# Altium PCB S6XT10W.PcbDoc (part 1 of 2)
Units mm, origin at the board's own origin, x right, y up, seen from the top; angles counter-clockwise.
Board outline 35 x 65.67 mm, 5 copper layers (Top Layer, Mid-Layer 2, Mid-Layer 6, Mid-Layer 13, Bottom Layer); 90 components, 58 nets, 296 pads, 188 vias.
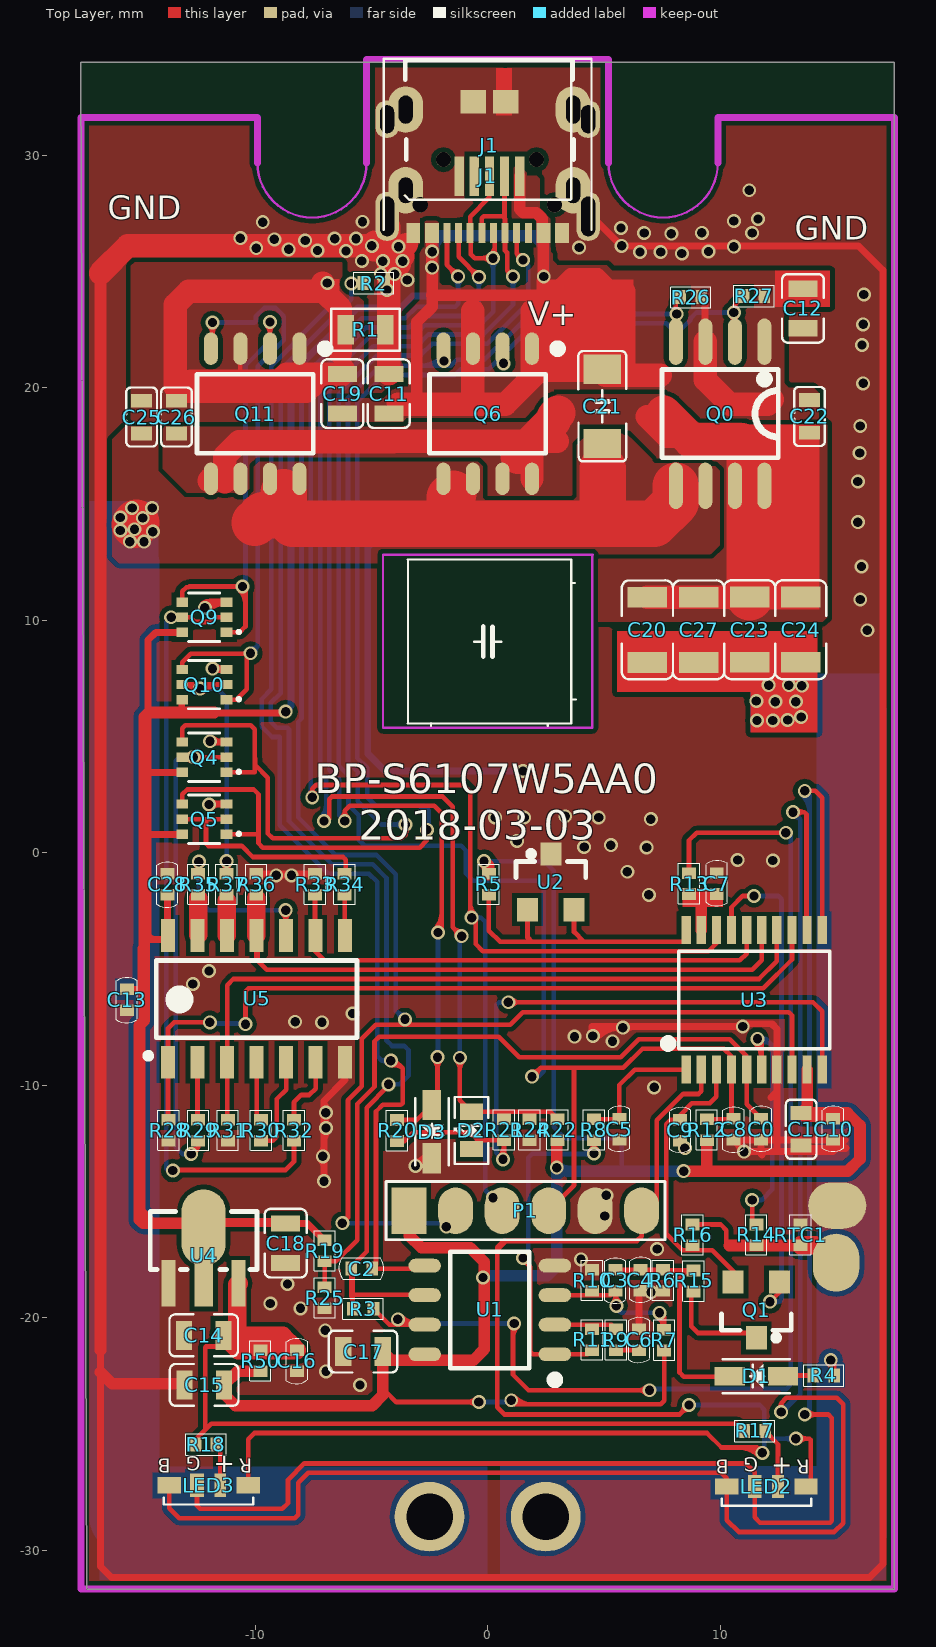
[diagram p0: Top Layer view]
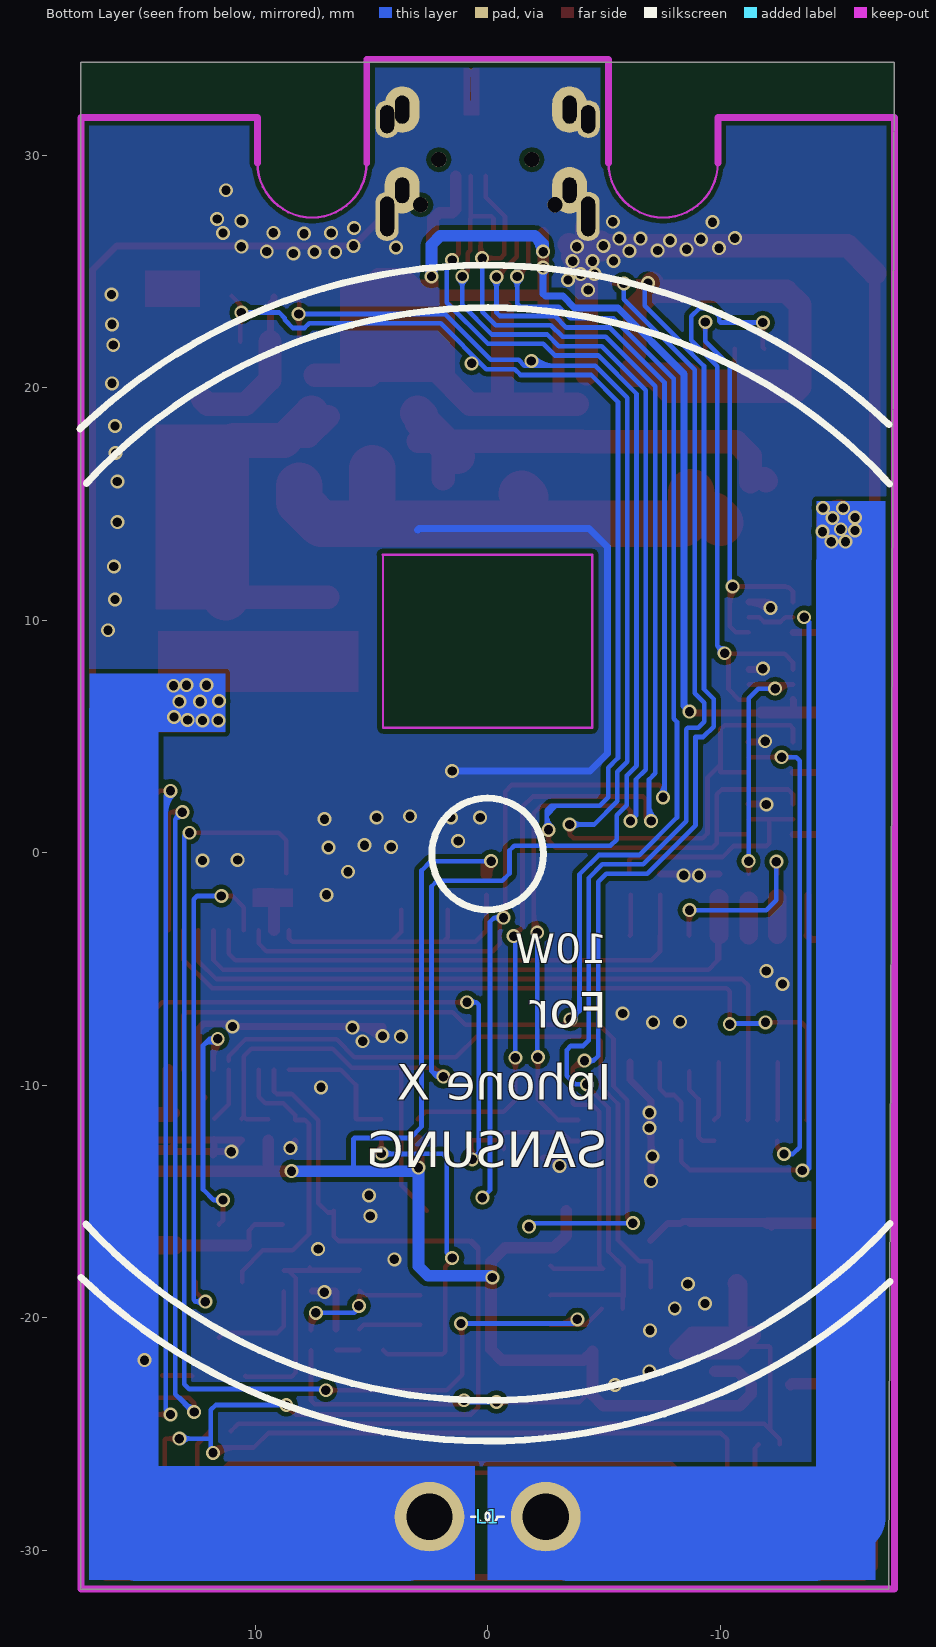
[diagram p1: Bottom Layer view, seen from below]
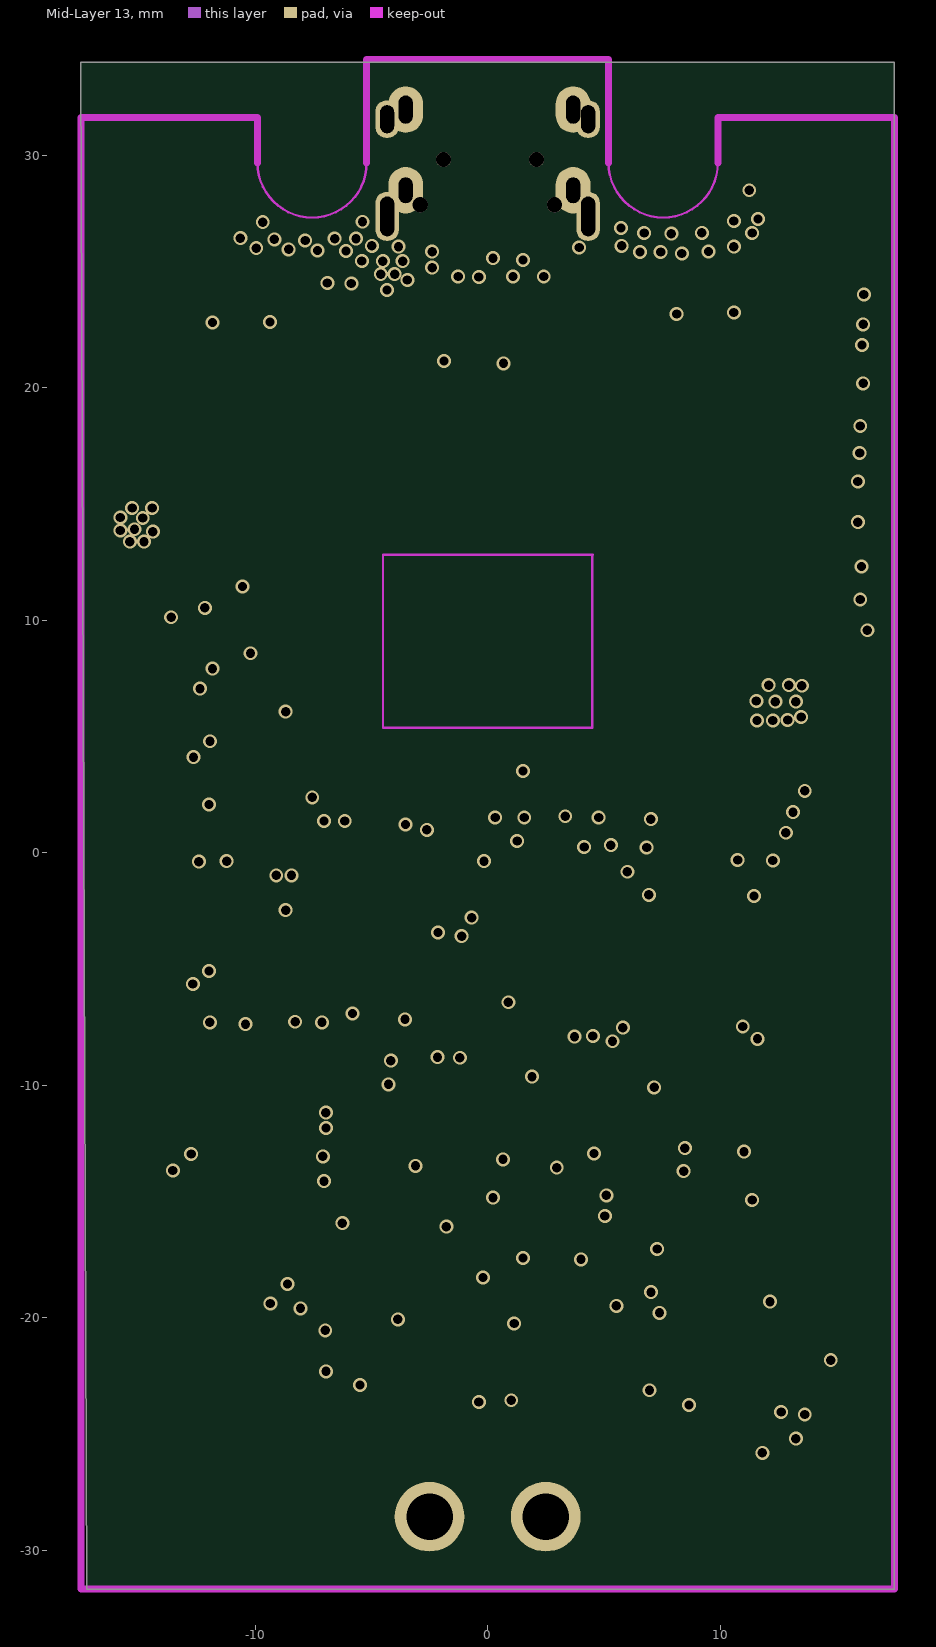
[diagram p2: Mid-Layer 13]

## Layer stack, top to bottom
Top Layer: signal copper 0.0356
Dielectric: dielectric 0.32, FR-4, Dk 4.8
Mid-Layer 2: signal copper 0.0356
Dielectric: dielectric 0.32, FR-4, Dk 4.8
Mid-Layer 6: signal copper 0.0356
Dielectric: dielectric 0.32, FR-4, Dk 4.8
Mid-Layer 13: signal copper 0.0356
Dielectric: dielectric 0.32, FR-4, Dk 4.8
Bottom Layer: signal copper 0.0356

## Board outline
-17.25,-31.674 17.499,-31.674 17.5,-31.673 17.5,34 -17.5,34

## Design rules (kind name [scope] priority, off if disabled: settings)
Clearance [All] p1: gap=0.2
ComponentClearance [All] p1 off: gap=0.254 collisioncheckmode=3 verticalgap=0.254 showdistances=FALSE
FabricationTestPointUsage TestPointUsage [All] p1: valid=0 allowmultiple=FALSE
FabricationTestpoint Testpoint [All] p1: side=3 testpointundercomponent=TRUE minsize=1.016 maxsize=2.54 preferedsize=1.524 minholesize=0 maxholesize=1.016 preferedholesize=0.813 testpointgrid=0.025 allowsidetop=TRUE allowsidebottom=TRUE usegrid=TRUE gridtolerance=0
HoleToHoleClearance [All] p1 off: gap=0.254 allowstackedmicrovias=TRUE
MinimumSolderMaskSliver [All] p1 off: minsoldermaskwidth=0.254
PlaneConnect [All] p1: planeconnectstyle=Direct reliefexpansion=0.508 reliefentries=4 reliefconductorwidth=0.254 reliefairgap=0.254
PolygonConnect [All] p1: connectstyle=Direct reliefconductorwidth=0.254 reliefentries=4 polygonreliefangle="90 Angle"
RoutingVias [All] p1: holewidth=0.4 width=0.6 viastyle="Through Hole" minholewidth=0.4 minwidth=0.6 maxholewidth=0.4 maxwidth=0.6
SilkToSilkClearance [All] p1 off: silktosilkclearance=0.254
SilkscreenOverComponentPads [All] p1 off: minsilkscreentomaskgap=0.254
SolderMaskExpansion [All] p1: expansion=0.102
Width [All] p1: maxlimit=5 minlimit=0.1 preferedwidth=0.2
20 further rules are at their usual default settings.

## Classes and differential pairs
component class XL-PT900XT10W_MAIN: C0 C3 C4 C5 C7 C8 C9 C10 C17 D1 LED2 LED3 P1 Q1 R4 R5 R6 R7 R8 R9 R10 R11 R12 R13 R14 R15 R16 R17 R18 RTC1 U1 U2 U3
component class "XL-PT900XT10W POWER_V17": C1 C2 C11 C12 C13 C14 C15 C16 C18 C19 C20 C21 C22 C23 C24 C25 C26 C27 C28 D2 D3 J1 L1 Q0 Q4 Q5 Q6 Q9 Q10 Q11 R1 R2 R3 R19 R20 R21 R22 R24 R25 R26 R27 R28 R29 R30 R31 R32 R33 R34 R35 R36 R37 R50 U4 U5

## Components (designator, comment, footprint, x,y, rotation, side; value= is the part's Value field where it differs from the comment)
C0 "103" C0402 11.76,-11.887 r90 top
C1 "106" C0603 13.487,-11.887 r90 top
C2 "103" C0402 -5.41,-17.882 r180 top
C3 "103" C0402 5.493,-18.387 r270 top
C4 "333" C0402 6.568,-18.387 r90 top
C5 "103" C0402 5.664,-11.887 r90 top
C6 "104" C0402 6.518,-20.937 r270 top
C7 "103" C0402 9.855,-1.321 r90 top
C8 "104" C0402 10.578,-11.895 r270 top
C9 "102" C0402 8.28,-11.938 r90 top
C10 "104" C0402 14.859,-11.887 r90 top
C11 "106/16V" C0805 -4.25,19.75 r90 top
C12 "106/16V" C0805 13.564,23.419 r270 top
C13 "104" C0402 -15.519,-6.325 r270 top
C14 "226" C0805 -12.211,-20.752 r180 top
C15 "226" C0805 -12.192,-22.885 r0 top
C16 "100P" C0402 -8.204,-21.844 r270 top
C17 "226" C0805 -5.359,-21.45 r0 top
C18 "106/16V" C0805 -8.687,-16.789 r270 top
C19 "106/16V" C0805 -6.25,19.75 r90 top
C20 "104/50V" C1206#1 6.87,9.593 r90 top
C21 "223" C1206#2 4.928,19.202 r90 top
C22 "223" C0603 13.843,18.771 r90 top
C23 "104/50V" C1206#1 11.27,9.598 r90 top
C24 "473/50V" C1206#1 13.47,9.599 r90 top
C25 "223" C0603 -14.884,18.745 r270 top
C26 "223" C0603 -13.386,18.745 r270 top
C27 "104/50V" C1206#1 9.071,9.593 r90 top
C28 "104" C0402 -13.777,-1.356 r270 top
D1 "4148" sod323 11.557,-22.504 r180 top
D2 "Red" LED0603 -0.695,-11.941 r90 top
D3 "4148" SOD323 -2.4,-11.992 r270 top
J1 "USB5P" "USB -MRO05" 0.076,30.81 r0 top
J1 "Typer-c" "USB -MRO17" 0,29.108 r0 top locked
L1 "" l5mm 0,-28.551 r0 bottom
LED2 "RGB" LED-RGB02 11.989,-27.254 r180 top
LED3 "RGB" LED-RGB02 -12,-27.203 r180 top
P1 "" SPIN6 1.626,-15.392 r0 top
Q0 "4953" SOP8D#1 10,18.888 r180 top
Q1 "2N7002" SOT-23B 11.557,-19.66 r180 top
Q4 "2227" SOT363 -12.183,4.115 r90 top
Q5 "2227" SOT363 -12.183,1.448 r90 top
Q6 "4953" SOP8D#2 0,18.888 r180 top
Q9 "2227" SOT363 -12.183,10.135 r90 top
Q10 "2227" SOT363 -12.183,7.239 r90 top
Q11 "9926" SOP8D#2 -10,18.888 r180 top
R1 "0.033R" R0805 -5.25,22.5 r180 top
R2 "1K" R0402 -4.902,24.511 r0 top
R3 "33K" R0402 -5.359,-19.609 r0 top
R4 "1K" R0402 14.453,-22.479 r0 top
R5 "2.2K" R0402 0.051,-1.346 r270 top
R6 "33K" R0402 7.543,-18.387 r90 top
R7 "100K" R0402 7.595,-20.955 r90 top
R8 "1K" R0402 4.572,-11.913 r270 top
R9 "33K" R0402 5.518,-20.937 r90 top
R10 "68K" R0402 4.493,-18.387 r90 top
R11 "1M" R0402 4.493,-20.937 r90 top
R12 "10K" R0402 9.43,-11.913 r90 top
R13 "1K" R0402 8.661,-1.321 r90 top
R14 "1K" R0402 11.557,-16.434 r90 top
R15 "68K" R0402 8.859,-18.415 r270 top
R16 "10K" R0402 8.814,-16.434 r90 top
R17 "220" R0402 11.489,-24.867 r0 top
R18 "220" R0402 -12.116,-25.445 r0 top
R19 "10K" R0402 -7.01,-17.12 r90 top
R20 "4.7K" R0402 -3.895,-11.942 r90 top
R21 "4.7K" R0402 0.705,-11.911 r270 top
R22 "10K" R0402 3.005,-11.911 r270 top
R24 "2.2K" R0402 1.805,-11.911 r90 top
R25 "10K" R0402 -7.01,-19.13 r90 top
R26 "100K" R0402 8.738,23.901 r180 top
R27 "100K" R0402 11.455,23.952 r0 top
R28 "100K" R0402 -13.727,-11.938 r270 top
R29 "1K" R0402 -12.452,-11.938 r270 top
R30 "1K" R0402 -9.754,-11.938 r270 top
R31 "100K" R0402 -11.177,-11.938 r270 top
R32 "1K" R0402 -8.331,-11.938 r270 top
R33 "100K" R0402 -7.427,-1.356 r90 top
R34 "1K" R0402 -6.152,-1.356 r90 top
R35 "1K" R0402 -12.452,-1.356 r270 top
R36 "100K" R0402 -9.952,-1.356 r90 top
R37 "1K" R0402 -11.227,-1.356 r90 top
R50 "10R" R0402 -9.779,-21.844 r270 top
RTC1 "103J" R0402 13.462,-16.434 r270 top
U1 "LM358" SOP8 0.093,-19.661 r90 top locked
U2 "TL431" SOT-23-431 2.718,-1.245 r0 top
U3 "N76E003" SOP20 11.465,-6.325 r90 top
U4 "7150" SOT89a -12.217,-17.323 r0 top
U5 "4069" SOP14 -9.302,-6.281 r90 top locked
? "" C6070 0.076,9.093 r180 top

## Footprints (in the part's own frame and the unit in brackets; to place one, negate y for a bottom-side part, rotate by r counter-clockwise, add the part's x,y. Pads: shape width x height; smd on the part's side, far side on the other; paste and mask are expansions set on the pad)
C0402 [mm]
  rect 0.5x0.6 smd: 1(-0.45,0) 2(0.45,0)
  silkscreen extent -0.95,-0.46 0.99,0.46
C0603 [mm]
  rect 0.6x0.9 smd: 1(-0.7,0) 2(0.7,0)
  silkscreen extent -1.27,-0.66 1.27,0.66, body extent -0.8,-0.4 0.8,0.4, height 0.4
C0805 [mm]
  rect 0.7x1.25 smd: 1(-0.85,0) 2(0.85,0)
  silkscreen extent -1.47,-0.9 1.47,0.9, body extent -1,-0.62 1,0.63, height 0.8
C1206#1 [mm]
  rect 0.9x1.7 smd: 1(-1.4,0) 2(1.4,0)
  silkscreen extent -2.13,-1.1 2.13,1.1, body extent -1.6,-0.8 1.6,0.8, height 1.02
C1206#2 [mm]
  rect 1.25x1.6 smd: 1(-1.6,0) 2(1.6,0)
  silkscreen extent -2.36,-1.04 2.38,1.02, body extent -1.6,-0.8 1.6,0.8, height 0.55
C6070 [mm]
  silkscreen extent -3.71,-3.52 3.52,3.63
l5mm [mm]
  round 3 hole 2: 1(-2.5,0) 2(2.5,0)
  silkscreen extent -0.69,-0.21 0.7,0.25
LED0603 [mm]
  rect 0.7x1 smd mask+0.05: 1(-0.8,0) 2(0.8,0)
  silkscreen extent -1.44,-0.73 1.44,0.76
LED-RGB02 [mm]
  rect 0.5x1 smd: 1(-0.5,0)
  rect 1x0.7 smd: 2(1.7,0) 4(-1.7,0)
  rect 0.6x1 smd: 3(0.5,0)
  silkscreen extent -1.92,0.53 1.92,0.83
R0402 [mm]
  rect 0.5x0.6 smd: 1(-0.45,0) 2(0.45,0)
  silkscreen extent -0.86,-0.46 0.86,0.46
R0805 [mm]
  rect 0.7x1.25 smd: 1(-0.85,0) 2(0.85,0)
  silkscreen extent -1.48,-0.9 1.48,0.9, body extent -1,-0.63 1,0.63, height 0.55
sod323 [mm] "0805"
  rect 1.3x0.8 smd: 1(-1.15,0) 2(1.14,0)
  silkscreen extent -1.44,-0.72 1.44,0.73, body extent -1.3,-0.65 1.3,0.65, height 1
SOD323 [mm] "0805"
  rect 1.3x0.8 smd: 1(-1.15,0) 2(1.14,0)
  silkscreen extent -1.44,-0.72 1.44,0.73, body extent -1.3,-0.65 1.3,0.65, height 1
SOP8 [mm]
  oval 0.6x1.4 smd: 1(-1.905,-2.8) 2(-0.635,-2.8) 3(0.635,-2.8) 4(1.905,-2.8) 5(1.905,2.8) 6(0.635,2.8) 7(-0.635,2.8) 8(-1.905,2.8)
  silkscreen extent -3.11,-2.91 2.5,1.7, body extent -2.5,-3.03 2.52,3.01, height 1.6
SOP8D#1 [mm]
  oval 0.6x2 smd: B1(-0.635,-3.1) B2(1.905,-3.1) C1(-1.905,3.1) C1(-0.635,3.1) C2(0.635,3.1) C2(1.905,3.1) E1(-1.905,-3.1) E2(0.635,-3.1)
  silkscreen extent -2.5,-1.9 2.5,1.9
SOP8D#2 [mm]
  oval 0.6x1.4 smd: B1(-0.635,-2.8) B2(1.905,-2.8) C1(-1.905,2.8) C1(-0.635,2.8) C2(0.635,2.8) C2(1.905,2.8) E1(-1.905,-2.8) E2(0.635,-2.8)
  silkscreen extent -3.11,-2.91 2.5,1.7, body extent -2.5,-3.02 2.52,3.02, height 1.6
SOP14 [mm]
  rect 1.4x0.6 smd: 1(-2.725,4.445) 2(-2.725,3.175) 3(-2.725,1.905) 4(-2.725,0.635) 5(-2.725,-0.635) 6(-2.725,-1.905) 7(-2.725,-3.175) 8(2.725,-3.175) 9(2.725,-1.905) 10(2.725,-0.635) 11(2.725,0.635) 12(2.725,1.905) 13(2.725,3.175) 14(2.725,4.445)
  silkscreen extent -2.57,-3.68 1.65,5.42, body extent -3.06,-3.7 3.14,5, height 1.61
SOP20 [mm]
  rect 1.2x0.4 smd: 1(-3,2.925) 2(-3,2.275) 3(-3,1.625) 4(-3,0.975) 5(-3,0.325) 6(-3,-0.325) 7(-3,-0.975) 8(-3,-1.625) 9(-3,-2.275) 10(-3,-2.925) 11(3,-2.925) 12(3,-2.275) 13(3,-1.625) 14(3,-0.975) 15(3,-0.325) 16(3,0.325) 17(3,0.975) 18(3,1.625) 19(3,2.275) 20(3,2.925)
  silkscreen extent -2.1,-3.25 2.1,3.81, body extent -3.28,-3.3 3.27,3.3, height 1.2
SOT89a [mm] "7133"
  rect 0.8x2 smd: Vin(0,-1.2)
  oval 1.9x3.3 smd: Vin(0,1.2)
  rect 0.6x2 smd: Vout(1.5,-1.2) Vss(-1.5,-1.2)
  silkscreen extent -2.3,-0.6 2.3,1.9, body extent -2.25,-1.76 2.25,2.54, height 1.51
SOT363 [mm]
  rect 0.4x0.5 smd: 1(-0.65,-0.95) 2(0,-0.95) 3(0.65,-0.95) 4(0.65,0.95) 5(0,0.95) 6(-0.65,0.95)
  silkscreen extent -1.04,-1.49 1.04,0.68
SOT-23-431 [mm]
  rect 0.9x1 smd: 1(0,1.2) 2(-1,-1.2) 3(1,-1.2)
  silkscreen extent -1.5,0.18 1.5,1.32, body extent -1.5,-1.4 1.5,1.4, height 1.2
SOT-23B [mm]
  rect 0.9x1 smd: B(-1,-1.2) C(0,1.2) E(1,-1.2)
  silkscreen extent -1.5,0.17 1.5,1.32, body extent -1.45,-1.4 1.45,1.4, height 1.2
SPIN6 [mm]
  rect 1.5x2 smd paste-200: 1(-5,0)
  oval 1.5x2 smd paste-200: 2(-3,0) 3(-1,0) 4(1,0) 5(3,0) 6(5,0)
  silkscreen extent -6,-1.25 6,1.25
"USB -MRO05" [mm]
  rect 0.4x1.7 smd: 1(1.3,-1.7) 2(0.65,-1.7) 3(0,-1.7) 4(-0.65,-1.7) 5(-1.3,-1.7)
  oval 1.5x2 smd: 6(-3.6,-2.31) 6(-3.6,1.16) 6(3.6,-2.31) 6(3.6,1.16)
  oval 1.5x2 hole 0.6 slot 1.1 at 90 deg: 6(-3.6,-2.31) 6(3.6,-2.31)
  oval 1.5x2 hole 0.6 slot 1.2 at 90 deg: 6(-3.6,1.16) 6(3.6,1.16)
  rect 1.1x1 smd: 6(-0.7,1.5) 6(0.7,1.5)
  round 0.65 hole 0.65 unplated: ""(-1.975,-0.99) ""(2.025,-0.99)
  silkscreen extent -3.63,-0.99 3.63,3.31
"USB -MRO17" [mm]
  rect 0.6x0.85 smd: 1(-3.2,-2.447) 2(-2.4,-2.447) 11(2.4,-2.447) 12(3.2,-2.447)
  rect 0.3x0.85 smd: 3(-1.75,-2.447) 4(-1.25,-2.447) 5(-0.75,-2.447) 6(-0.25,-2.447) 7(0.25,-2.447) 8(0.75,-2.447) 9(1.25,-2.447) 10(1.75,-2.447)
  round 0.65 hole 0.65: 22(-2.9,-1.232) 22(2.88,-1.232)
  rrect90% 1x1.6 hole 0.6 slot 1.2 at 90 deg: G(-4.325,2.448) G(4.325,2.448)
  rrect90% 1x2.1 hole 0.6 slot 1.7 at 90 deg: G(-4.32,-1.732) G(4.325,-1.732)
  silkscreen extent -4.47,-2.3 4.46,5.05

## Part data
C0 C1 C2 C5 C7 C8 C9 C10 C13 C16 C21 C22 C25 C26 C28: library part Cap, "Capacitor"
C3 C4 C6 C11 C12 C14 C15 C17 C18 C19 C20 C23 C24 C27: library part CH
D1 D3: library part D0, "1N4001"
D2: library part LED02
L1: library part L, "1uH"
LED3: library part LED05
P1: library part "Header 6", "Header, 6-Pin"
Q0 Q6: library part MOSFETP2
Q1: library part MOSFETN
Q4 Q5 Q9 Q10: library part N+PS
Q11: library part MOSFETN2
R1 R3 R5 R6 R7 R9 R10 R11 R15 R16 R19 R20 R21 R22 R24 R25 R26 R27 R28 R31 R33 R36: library part R, "1K"
R2 R4 R8 R12 R13 R14 R29 R30 R32 R34 R35 R37: library part R
R17 R18 R50: library part Res01
RTC1: library part RTC
U1: library part 4558
U2: library part "IC TL431", "IC"
U3: library part 103F
U4: library part VOLTREG
U5: library part CD4069

## Free pads (board coordinates)
  round 2.5 on Top Solder: 0(-12.021,27.671) 0(4.963,23.089) 0(11.187,27.064)
  oval 2x2.5 smd: 1(14.986,-17.628)
  oval 2.5x2 smd: 1(15.037,-15.174)

## Via types
v1: diameter 0.6, hole 0.4, Top Layer to Bottom Layer, 188 vias

## Nets (pads, with @x,y where several pads share a name; then routed paths per layer and width w, separated by ;. In a path a pad name is that pad's centre, name@x,y a point inside that pad or via, vN(x,y) a via of type N, cw(c..) or ccw(c..) an arc to the next point about the centre after c; other vN are vias at no path point)
5V: C14.1 C16.1 R17.1 R18.1 R50.1 U4.Vout | length 40
  Top Layer w0.2: R18.1@-12.566,-25.445 -12.566,-25.231 -12.151,-24.816 ; C16.1@-8.204,-21.394 -8.364,-21.234 -10.879,-21.234 -12.116,-21.234 -12.151,-21.269 -12.151,-24.816 ; R17.1@11.039,-24.867 10.728,-24.555 -11.89,-24.555 -12.151,-24.816
  Top Layer w0.8: C14.1@-11.361,-20.752 -10.879,-21.234 -10.719,-21.394 R50.1@-9.779,-21.394 C16.1@-8.204,-21.394 ; U4.Vout@-10.717,-18.523 -10.77,-18.575 -10.77,-20.625 -10.617,-20.777 -8.821,-20.777 C16.1@-8.364,-21.234
A_PWM: R28.1 U3.13 U5.1 | length 34.3
  Top Layer w0.2: R28.1@-13.727,-11.488 -13.747,-11.468 U5.1@-13.747,-9.006 -13.747,-7.549 -13.487,-7.29 v1(-11.948,-7.29) ; v1@-10.414,-7.493 -10.414,-5.952 -10.287,-5.825 11.853,-5.825 13.09,-4.588 U3.13@13.09,-3.325
  Bottom Layer w0.2: v1(-11.948,-7.29) -11.898,-7.341 -10.566,-7.341 v1@-10.414,-7.493
  other v1: -10.414,-7.366
"AMP AD": R3.2 R13.2 U1.7 | length 54.8
  Top Layer w0.2: R3.2@-4.909,-19.609 -4.222,-20.296 U1.7@-2.707,-20.296 ; v1(-3.861,-20.066) ccw(c-3.304,-19.51) U1.7@-3.304,-20.296 ; v1@-3.719,-19.925 ccw(c-2.822,-19.027) U1.7@-2.822,-20.296 ; v1@1.002,-20.385 cw(c0.783,-20.604) 1.092,-20.604 ; 1.092,-20.849 cw(c1.748,-20.849) v1@1.284,-20.385 ; v1(1.143,-20.244) 1.118,-20.269 1.092,-20.269 1.092,-22.449 1.757,-23.114 v1(6.96,-23.114) ; v1@6.818,-23.255 ccw(c6.477,-23.597) 6.477,-23.114 ccw(c6.477,-22.631) v1@6.818,-22.973 ; R13.2@8.661,-0.871 8.661,0.533 8.992,0.864 v1(12.827,0.864)
  Bottom Layer w0.2: v1(-3.861,-20.066) -3.683,-20.244 v1(1.143,-20.244) ; v1(6.96,-23.114) 7.01,-23.063 12.84,-23.063 13.043,-22.86 13.043,0.737 12.916,0.864 v1(12.827,0.864)
B: LED2.2 LED3.2 U3.12 | length 78.6
  Top Layer w0.2: LED3.2@-13.7,-27.203 -13.7,-28.185 -13.265,-28.619 -8.299,-28.619 -8.153,-28.473 -8.153,-27.102 -7.715,-26.664 10.052,-26.664 10.289,-26.9 LED2.2@10.289,-27.254 10.289,-28.704 10.795,-29.21 14.91,-29.21 15.291,-28.829 15.291,-23.724 15.011,-23.444 12.852,-23.444 12.624,-23.673 ; v1@12.51,-23.889 ccw(c12.361,-23.673) 12.624,-23.673 ; v1(12.624,-24.054) 12.624,-23.673 ; v1@12.737,-23.889 cw(c12.887,-23.673) 12.624,-23.673 ; v1(13.132,1.753) 13.614,1.753 ; v1@13.273,1.611 cw(c13.614,1.27) 13.614,1.753 ; v1@13.273,1.894 ccw(c13.614,2.235) 13.614,1.753 ; U3.12@13.74,-3.325 13.716,-3.301 13.716,1.651 13.614,1.753
  Bottom Layer w0.2: 12.925,-23.81 ccw(c13.169,-24.054) 12.824,-24.054 cw(c13.307,-24.054) 12.965,-23.712 cw(c12.624,-23.371) 12.624,-23.854 ccw(c12.624,-23.233) 13.063,-23.672 ; v1(13.132,1.753) 13.443,1.441 ; v1@13.145,1.553 cw(c13.171,1.17) 13.443,1.441 ; 13.24,-23.438 v1(12.624,-24.054) 12.681,-24.054 13.443,-23.292 13.443,1.441 ; v1@13.331,1.739 ccw(c13.715,1.713) 13.443,1.441
B_PWM: R33.1 U3.16 U5.9 | length 23
  Top Layer w0.2: R33.1@-7.427,-1.806 U5.9@-7.427,-3.526 ; U3.16@11.14,-3.325 11.14,-4.335 10.851,-4.625 -7.034,-4.625 -7.397,-4.262 ; U5.9@-7.427,-3.526 U5.9@-7.397,-3.556 -7.397,-4.262 ; U5.9@-7.427,-3.526 -7.427,-4.232 -7.397,-4.262
CLK: J1.4@-1.25,26.661 P1.3 U3.18 | length 72
  Top Layer w0.2: v1@-7.65,2.557 ccw(c-7.769,2.749) -7.544,2.749 ; v1(-7.544,2.388) -7.544,2.749 ; v1@-7.438,2.557 cw(c-7.318,2.749) -7.544,2.749 ; J1.4@-1.25,26.661 -1.25,25.634 v1(-0.381,24.765) ; v1@-0.826,-2.647 ccw(c-1.005,-2.468) -0.752,-2.468 ; -0.752,-2.143 ccw(c-0.04,-2.143) v1@-0.544,-2.647 ; v1@-0.581,24.765 ccw(c-1.064,24.765) -0.722,25.106 ccw(c-0.381,25.448) v1@-0.381,24.965 ; U3.18@9.84,-3.325 9.84,-3.899 9.515,-4.225 -0.214,-4.225 -0.518,-3.922 -0.518,-2.956 v1(-0.685,-2.788) -0.752,-2.721 -0.752,2.627 -1.047,2.921 -7.371,2.921 -7.544,2.749
  Bottom Layer w0.2: v1@-7.685,2.529 ccw(c-7.876,2.72) -7.606,2.72 ; -7.606,3.021 ccw(c-6.91,3.021) v1@-7.402,2.529 ; v1(-7.544,2.388) -7.606,2.45 -7.606,20.235 -5.247,22.594 -3.388,22.594 -2.887,23.095 -0.514,23.095 -0.381,23.228 v1(-0.381,24.765) ; v1(-0.685,-2.788) -0.285,-2.788 ; v1@-0.525,-2.908 cw(c-0.285,-3.089) -0.285,-2.788 ; v1@-0.525,-2.668 ccw(c-0.285,-2.488) -0.285,-2.788 ; v1@-0.522,24.624 cw(c-0.864,24.282) -0.381,24.282 cw(c0.102,24.282) v1@-0.24,24.624 ; v1(0.229,-14.834) -0.102,-14.503 -0.102,-2.972 -0.285,-2.788
CODE2_DET: C9.2 Q1.E R16.1 U3.3 | length 12.7
  Top Layer w0.2: U3.3@9.84,-9.325 9.84,-10.491 9.562,-10.77 8.788,-10.77 8.28,-11.278 C9.2@8.28,-11.488 7.867,-11.488 7.68,-11.674 7.68,-16.393 8.382,-17.094 9.663,-17.094 10.557,-17.988 Q1.E@10.557,-18.46
CODE_DET: R8.2 R11.1 U1.1 | length 16.4
  Top Layer w0.2: v1(1.524,-17.424) 1.499,-17.424 1.473,-17.45 1.829,-17.805 1.829,-21.45 1.945,-21.566 U1.1@2.893,-21.566 4.313,-21.566 R11.1@4.493,-21.387 ; v1@4.431,-12.787 ccw(c4.089,-12.446) 4.572,-12.446 ccw(c5.055,-12.446) v1@4.713,-12.787 ; v1(4.572,-12.929) R8.2@4.572,-12.363
  Bottom Layer w0.2: v1(1.524,-17.424) 1.753,-17.196 1.753,-13.106 1.921,-12.938 3.22,-12.938 3.236,-12.954 4.572,-12.954 v1(4.572,-12.929) ; 4.028,-12.954 ccw(c4.028,-12.384) v1@4.431,-12.787 ; 4.15,-12.954 cw(c4.15,-13.35) v1@4.431,-13.07
COM: LED2.4 LED3.4 P1.6 U3.2 | length 69.2
  Top Layer w0.2: LED3.4@-10.3,-27.203 -10.3,-25.222 -10.033,-24.955 9.436,-24.955 10.058,-25.578 11.587,-25.578 ; 0.686,-16.692 0.406,-16.972 0.406,-17.084 ; P1.6@6.626,-15.392 P1.6@6.626,-15.469 ; v1@8.461,-23.749 cw(c7.979,-23.749) 8.32,-24.09 cw(c8.661,-24.432) v1@8.661,-23.949 ; v1(8.661,-23.749) 8.255,-24.155 0.711,-24.155 0.406,-23.851 0.406,-17.084 ; U3.2@9.19,-9.325 9.19,-10.25 9.071,-10.37 8.42,-10.37 7.28,-11.509 7.28,-15.072 6.883,-15.469 P1.6@6.626,-15.469 ; 10.781,-25.578 cw(c10.781,-26.841) v1@11.674,-25.948 ; 11.264,-25.578 cw(c11.264,-26.358) v1(11.816,-25.806) 11.587,-25.578 ; v1@11.626,-25.743 ccw(c11.473,-25.692) 11.587,-25.578 ; v1@11.752,-25.617 cw(c11.701,-25.464) 11.587,-25.578 ; v1(13.259,-25.197) 13.843,-25.197 13.894,-25.248 13.894,-27.049 LED2.4@13.689,-27.254 ; v1@13.4,-25.338 cw(c13.742,-25.68) 13.742,-25.197 cw(c13.742,-24.714) v1@13.4,-25.055 ; 0.406,-17.084 0.798,-16.692 6.422,-16.692 6.626,-16.488 P1.6@6.626,-15.469
  Bottom Layer w0.2: v1(8.661,-23.749) 11.7,-23.749 11.903,-23.952 11.903,-24.623 11.903,-25.197 ; v1(11.816,-25.806) 11.903,-25.719 11.903,-25.197 ; v1@13.117,-25.338 ccw(c12.776,-25.68) 12.776,-25.197 ccw(c12.776,-24.714) v1@13.117,-25.055 ; v1(13.259,-25.197) 12.476,-25.197 11.903,-25.197
D+: D2.2 J1.3@0.076,29.11 J1.5@-0.75,26.661 J1.7 R21.1 R22.1 R24.2 | length 64
  Top Layer w0.2: v1@-6.909,1.346 -6.807,1.448 -6.807,2.311 -6.696,2.422 -1.94,2.422 -1.499,1.981 -1.499,-3.2 v1(-1.118,-3.581) ; v1@-1.335,-8.955 cw(c-1.677,-9.297) -1.194,-9.297 cw(c-0.711,-9.297) v1@-1.052,-8.955 ; v1@-1.318,-3.581 ccw(c-1.8,-3.581) -1.459,-3.24 ccw(c-1.118,-2.899) v1@-1.118,-3.381 ; v1(-1.194,-8.814) -1.194,-10.642 D2.2@-0.695,-11.141 2.685,-11.141 R22.1@3.005,-11.461 ; J1.3@0.076,29.11 0.076,28.19 -0.75,27.364 J1.5@-0.75,26.661 -0.721,26.632 -0.721,25.74 -0.559,25.578 v1(0.234,25.578) 0.305,25.649 0.305,26.107 ; v1@0.093,25.436 ccw(c-0.249,25.095) -0.249,25.578 ccw(c-0.249,26.061) v1@0.093,25.719 ; v1@0.117,25.74 ccw(c-0.147,26.107) 0.305,26.107 ; J1.7@0.25,26.661 0.3,26.611 0.3,26.112 0.305,26.107 ; 0.305,25.89 ccw(c0.546,25.89) v1@0.375,25.719
  Bottom Layer w0.2: v1@-7.177,1.513 ccw(c-7.741,2.077) -6.944,2.077 ; v1@-7.087,1.372 -6.944,1.514 -6.944,3.156 -7.206,3.418 -7.206,20.069 -5.081,22.194 -3.222,22.194 -2.722,22.695 -0.349,22.695 0.234,23.277 v1(0.234,25.578) ; v1@-1.273,-8.63 ccw(c-1.326,-8.509) -1.194,-8.509 ; v1(-1.118,-3.581) -1.194,-3.658 -1.194,-8.509 ; v1@-1.114,-8.63 cw(c-1.062,-8.509) -1.194,-8.509 ; v1@0.093,25.436 cw(c-0.249,25.095) 0.234,25.095 cw(c0.717,25.095) v1@0.375,25.436
  other v1: -7.036,1.372
D-: D3.1 J1.2@0.726,29.11 J1.6@-0.25,26.661 J1.8 R20.2 | length 58.8
  Top Layer w0.2: v1@-6.278,1.523 ccw(c-6.525,1.809) -6.147,1.809 ; v1(-6.147,1.372) -6.147,1.809 ; v1@-6.016,1.523 cw(c-5.769,1.809) -6.147,1.809 ; R20.2@-3.895,-11.492 -3.05,-11.492 D3.1@-2.4,-10.842 -2.159,-10.601 v1(-2.159,-8.788) ; v1@-2.3,-8.93 cw(c-2.642,-9.271) -2.159,-9.271 cw(c-1.676,-9.271) v1@-2.018,-8.93 ; v1@-2.275,-3.288 ccw(c-2.984,-2.578) -1.981,-2.578 ; -1.981,-3.061 cw(c-2.502,-3.061) v1(-2.134,-3.429) -1.981,-3.277 -1.981,1.702 -2.302,2.022 -5.933,2.022 -6.147,1.809 ; J1.6@-0.25,26.661 -0.25,27.298 -0.162,27.386 0.524,27.386 0.529,27.381 0.635,27.381 0.726,27.29 ; J1.8@0.721,26.632 J1.8@0.75,26.661 ; J1.2@0.726,29.11 0.726,27.29 ; v1@0.9,24.844 ccw(c0.713,24.896) 0.85,25.033 ; v1@1.039,24.983 cw(c0.987,25.169) 0.85,25.033 ; v1(1.092,24.79) 0.85,25.033 ; 0.726,27.29 0.75,27.266 J1.8@0.75,26.661 ; J1.8@0.75,26.661 0.75,25.91 0.834,25.826 0.834,25.797 0.85,25.781 0.85,25.033
  Bottom Layer w0.2: v1(-6.147,1.372) -6.382,1.606 -6.382,3.159 -6.806,3.584 -6.806,19.903 -4.915,21.794 -3.057,21.794 -2.556,22.295 -0.183,22.295 1.092,23.57 v1(1.092,24.79) ; v1@-2.232,-8.602 ccw(c-2.288,-8.458) -2.134,-8.458 ; -2.159,-8.484 -2.134,-8.458 ; v1(-2.134,-3.429) -2.134,-8.458 ; v1@-2.046,-8.623 cw(c-1.934,-8.458) -2.134,-8.458 ; v1@0.951,24.649 cw(c0.609,24.308) 1.092,24.308 cw(c1.575,24.308) v1@1.234,24.649
DATA: J1.3@-1.75,26.661 P1.2 U3.8 | length 79.6
  Top Layer w0.2: v1(-6.248,-15.926) -6.008,-15.685 ; v1@-6.194,-15.733 ccw(c-6.142,-15.552) -6.008,-15.685 ; v1@-6.056,-15.871 cw(c-5.874,-15.819) -6.008,-15.685 ; v1@-3.556,-7.137 -3.296,-7.398 ; v1@-3.492,-7.352 cw(c-3.43,-7.532) -3.296,-7.398 ; v1@-3.359,-7.197 ccw(c-3.134,-7.237) -3.296,-7.398 ; J1.3@-1.75,26.661 -1.75,25.29 -1.25,24.79 v1(-1.27,24.79) ; -1.626,25.166 cw(c-2.001,24.79) v1@-1.47,24.79 ; -1.577,25.118 ccw(c-1.27,25.425) v1@-1.27,24.99 ; U3.8@13.09,-9.325 13.09,-6.994 12.954,-6.858 1.505,-6.858 0.965,-7.398 -3.296,-7.398 ; -6.008,-15.685 -6.008,-10.635 -5.414,-10.041 -5.414,-8.004 -4.807,-7.398 -3.296,-7.398
  Bottom Layer w0.2: v1(-6.248,-15.926) -1.93,-15.926 v1(-1.778,-16.078) ; v1@-3.756,-7.163 ccw(c-4.239,-7.163) -3.897,-6.821 ccw(c-3.556,-6.48) v1@-3.556,-6.963 ; v1(-3.556,-7.163) -3.912,-6.807 -3.952,-6.807 -3.952,-0.917 -4.774,-0.095 -6.527,-0.095 -8.144,1.521 -8.144,5.628 -8.006,5.766 -8.006,20.401 -5.412,22.994 -3.554,22.994 -3.053,23.495 -1.397,23.495 -1.27,23.622 v1(-1.27,24.79) ; v1@-1.411,24.649 cw(c-1.753,24.308) -1.27,24.308 cw(c-0.787,24.308) v1@-1.129,24.649
DOWN-A: Q9.2 Q9.5 R32.2 | length 32.5
  Top Layer w0.2: v1@-13.538,-13.64 -8.687,-13.64 -8.331,-13.284 R32.2@-8.331,-12.388 ; Q9.5@-13.133,10.135 -12.802,10.135 -12.598,9.931 -11.887,9.931 -11.684,10.135 Q9.2@-11.233,10.135
  Bottom Layer w0.2: v1(-13.614,10.135) -13.821,9.928 -13.821,-13.586 v1@-13.538,-13.868
  other v1: -13.538,-13.665
DOWN-B: Q10.2 Q10.5 R37.2 | length 14
  Top Layer w0.2: -12.729,7.239 cw(c-12.729,6.788) v1(-12.37,7.061) cw(c-11.941,6.632) -11.941,7.239 ; v1@-12.529,6.94 ccw(c-13.133,6.48) Q10.5@-13.133,7.239 Q10.2@-11.233,7.239 ; v1@-12.228,6.92 cw(c-11.458,6.149) Q10.2@-11.458,7.239 ; v1@-11.368,-0.497 cw(c-11.71,-0.838) -11.227,-0.838 cw(c-10.744,-0.838) v1@-11.085,-0.497 ; R37.2@-11.227,-0.906 v1(-11.227,-0.356)
  Bottom Layer w0.2: v1(-12.37,7.061) -11.633,7.061 -11.227,6.655 v1(-11.227,-0.356)
G: LED2.3 LED3.3 U3.11 | length 73.3
  Top Layer w0.2: LED3.3@-12.5,-27.203 -12.5,-28.089 -12.37,-28.219 -8.839,-28.219 -8.585,-27.965 -8.585,-26.968 -7.881,-26.264 11.104,-26.264 11.489,-26.648 LED2.3@11.489,-27.254 11.489,-28.583 11.716,-28.81 14.732,-28.81 14.808,-28.734 14.808,-24.308 14.656,-24.155 v1(13.64,-24.155) ; v1(13.64,2.667) 14.097,2.667 14.39,2.374 U3.11@14.39,-3.325 ; v1@13.781,-24.297 cw(c14.123,-24.638) 14.123,-24.155 cw(c14.123,-23.673) v1@13.781,-24.014
  Bottom Layer w0.2: v1@13.498,2.526 cw(c12.666,1.694) 13.843,1.694 ; v1(13.64,-24.155) 13.843,-23.952 13.843,2.464 v1(13.64,2.667) cw(c13.149,2.176) 13.843,2.176
GND: C0.1 C1.1 C4.1 C5.1 C6.1 C7.2 C8.2 C9.1 C10.1 C11.2 C12.2 C13.2 C14.2 C15.1 C16.2 C17.1 C18.2 C28.1 D3.2 J1.1@-3.2,26.661 J1.5@-1.224,29.11 J1.6@0.776,32.31 J1.6@3.676,28.5 J1.6@3.676,31.97 J1.6@-0.624,32.31 J1.6@-3.524,28.5 J1.6@-3.524,31.97 J1.12 J1.22@-2.9,27.876 J1.G P1.5 pad.1@15.037,-15.174 Q4.3 Q5.3 Q9.3 Q10.3 R1.1 R2.2 R6.1 R10.2 R24.1 R25.1 R28.2 R31.2 R33.2 R36.2 RTC1.1 U1.4 U2.1 U3.7 U4.Vss U5.7 | length 271.3
  Top Layer w0.3: -16.651,-21.394 -16.651,-22.338 -16.651,-30.695 -16.18,-31.166 16.416,-31.166 ; v1@-12.274,10.646 cw(c-11.944,10.324) -11.944,10.785 ; v1(-12.167,10.541) -11.923,10.785 ; v1@-12.161,10.691 ccw(c-12.15,11.011) -11.923,10.785 ; v1@-12.059,10.436 cw(c-11.233,9.63) Q9.3@-11.233,10.785 -11.923,10.785 ; v1@-12.017,10.546 cw(c-11.696,10.558) -11.923,10.785 ; v1(-11.938,4.801) -11.902,4.765 Q4.3@-11.233,4.765 ; v1@-11.909,7.889 Q10.3@-11.233,7.889 ; v1@-11.883,1.977 cw(c-11.59,1.684) -11.59,2.098 ; v1@-11.883,2.189 ccw(c-11.663,2.409) -11.663,2.098 ; v1@-11.873,2.098 Q5.3@-11.233,2.098 ; v1@-11.832,4.907 ccw(c-11.489,5.249) -11.489,4.765 ; v1@-11.73,8.031 ccw(c-11.388,8.373) Q10.3@-11.388,7.889 ; R36.2@-9.952,-0.906 R33.2@-7.427,-0.906 ; -9.599,-0.906 cw(c-9.599,-1.471) v1@-9.199,-1.071 ; v1@-8.987,-1.071 cw(c-8.587,-1.471) v1@-8.587,-0.906 ; v1@-8.939,-0.906 cw(c-8.939,-1.471) v1@-8.539,-1.071 ; v1@-8.327,-1.071 cw(c-7.927,-1.471) -7.927,-0.906 ; v1@-7.193,-13.162 cw(c-7.571,-13.54) -7.036,-13.54 ; v1@-7.193,-12.95 ccw(c-7.571,-12.571) -7.036,-12.571 ; v1@-7.142,-14.016 ccw(c-7.398,-13.76) -7.036,-13.76 ccw(c-6.674,-13.76) v1@-6.93,-14.016 ; v1(-7.036,-14.122) -7.036,-10.668 ; -7.036,-12.392 cw(c-6.4,-12.392) v1@-6.85,-11.942 ; v1@-7.036,-11.72 cw(c-6.414,-11.72) v1@-6.854,-11.28 ; v1@-7.036,-11.281 ccw(c-6.4,-11.281) v1@-6.85,-11.73 ; v1@-6.86,-11.062 cw(c-6.507,-10.668) -7.036,-10.668 ; U5.7@-6.127,-9.006 -6.127,-9.759 -7.036,-10.668 ; v1(-3.099,-13.462) -3.073,-13.462 -2.743,-13.132 D3.2@-2.4,-13.132 ; v1@-3.099,-13.312 ccw(c-3.099,-12.889) D3.2@-2.799,-13.188 ; v1@-2.949,-13.462 cw(c-2.648,-13.462) -2.861,-13.249 ; J1.G@4.325,27.376 4.497,27.376 v1(5.766,26.107) 15.956,26.107 16.993,25.07 16.999,25.07 16.999,-30.583 16.416,-31.166 ; v1@4.416,-7.768 cw(c5.141,-8.493) 5.141,-7.468 ; v1(4.522,-7.874) 4.496,-7.847 4.496,-7.468 ; v1@4.625,-7.764 cw(c4.902,-7.468) 4.496,-7.468 ; v1@4.628,-7.98 cw(c5.866,-9.217) v1@5.866,-7.468 ; 5.332,-7.468 cw(c5.332,-8.003) v1@5.711,-7.624 ; v1@5.923,-7.624 cw(c6.301,-8.003) 6.301,-7.468 ; C6.1@6.518,-20.487 6.518,-18.887 C4.1@6.568,-18.837 ; v1@6.911,-18.995 ccw(c6.568,-19.287) C4.1@6.568,-18.837 ; v1@7.131,-19.004 cw(c7.535,-19.407) R6.1@7.535,-18.837 ; R6.1@7.543,-18.837 C4.1@6.568,-18.837 ; C9.1@8.28,-12.388 8.28,-12.497 v1(8.484,-12.7) ; C8.2@10.723,-12.49 cw(c10.361,-12.852) v1@10.874,-12.852 ; v1@10.867,-7.574 ccw(c10.611,-7.83) 10.611,-7.468 ccw(c10.611,-7.105) v1@10.867,-7.362 ; v1@11.13,-12.958 cw(c11.386,-13.215) 11.386,-12.852 cw(c11.386,-12.49) v1@11.13,-12.746 ; 11.811,-12.929 11.811,-13.005 11.76,-12.954 11.76,-12.852 ; 12.192,-10.516 12.44,-10.267 ; C1.1@13.487,-12.587 13.626,-12.725 14.99,-12.725 ; 15.418,-12.7 15.392,-12.725 14.99,-12.725 ; 4.496,-7.468 v1(10.973,-7.468) 11.049,-7.468 11.166,-7.351 12.221,-7.351 12.44,-7.57 U3.7@12.44,-9.325 12.44,-10.267 ; C0.1@11.753,-12.345 C0.1@11.76,-12.345 ; C0.1@11.753,-12.345 C8.2@10.578,-12.345 10.988,-12.754 10.988,-12.827 11.013,-12.852 v1(11.024,-12.852) 11.76,-12.852 ; C0.1@11.753,-12.345 C0.1@11.76,-12.337 C0.1@11.76,-12.345 ; 11.76,-12.852 12.421,-12.852 ; 11.76,-12.852 C0.1@11.76,-12.345 ; C0.1@11.76,-12.345 12.44,-12.345 ; 12.421,-12.852 14.863,-12.852 14.99,-12.725 ; 12.421,-12.852 12.44,-12.833 12.44,-12.345 ; 12.44,-12.345 15.371,-12.345 14.99,-12.725 ; 12.44,-12.345 12.44,-10.267 ; 16.416,-31.166 16.434,-31.166 16.426,-31.174 16.408,-31.174 16.416,-31.166
  Top Layer w0.5: -16.651,-22.338 -16.154,-22.835 -13.093,-22.835 C15.1@-13.042,-22.885 ; -16.651,-21.394 -16.651,24.917
  Top Layer w1: -16.651,24.917 -16.651,24.943 -15.482,26.112 v1(-4.978,26.112) ; v1@-4.897,25.929 ccw(c-5.341,26.926) -4.25,26.926 v1@-4.25,25.417 ; v1@-4.865,26.276 cw(c-5.673,25.105) -4.25,25.105 ; C11.2@-4.25,20.6 v1@-4.25,25.417 ; R2.2@-4.25,24.503 cw(c-2.71,24.503) v1@-3.799,25.592 ; v1@-4.25,24.857 cw(c-3.405,24.857) v1@-3.736,25.635 ; J1.G@-4.25,26.398 ccw(c-2.71,26.398) v1@-3.799,25.309 ; v1@-3.858,25.451 cw(c-2.991,25.451) v1@-3.604,26.063 ; v1@-3.649,25.651 ccw(c-3.685,24.852) v1@-4.25,25.417 ; -3.505,26.162 v1@-4.25,25.417
  Bottom Layer w0.3: v1@1.418,3.417 ccw(c1.162,3.161) 1.162,3.523 ccw(c1.162,3.885) v1@1.418,3.629 ; v1(1.524,3.523) -4.412,3.523 -5.156,4.267 -5.156,13.157 -4.369,13.945 2.946,13.945 2.997,13.894 3.023,13.894
  other v1: -5.486,-22.885 -6.956,-22.301 -6.985,-20.539 -8.049,-19.592 -9.347,-19.38 7.025,-18.898 -8.611,-18.542 4.013,-17.487 7.29,-17.043 5.043,-15.621 5.105,-14.732 -7.087,-13.056 -6.956,-11.836 -6.96,-11.174 7.163,-10.084 5.374,-8.103 3.734,-7.906 5.817,-7.518 -7.121,-7.29 -8.28,-7.264 -5.809,-6.909 -12.683,-5.639 -11.989,-5.08 6.934,-1.806 -9.093,-0.965 -8.433,-0.965 6.008,-0.813 12.268,-0.33 10.753,-0.305 6.842,0.229 4.15,0.254 5.299,0.33 1.27,0.508 7.018,1.448 0.323,1.524 1.575,1.524 4.775,1.524 3.339,1.575 -11.989,2.083 -11.836,7.925 16.332,9.576 16.027,10.897 16.078,12.319 15.926,14.224 15.926,15.977 16.002,17.196 16.027,18.364 16.154,20.193 16.104,21.844 16.154,22.733 16.18,24.015 -4.325,24.206 -3.454,24.638 -4.598,24.892 -4,24.892 -4.51,25.451 -3.658,25.451 -5.41,25.461 8.356,25.781 6.553,25.843 7.442,25.843 9.5,25.865 -6.096,25.889 -7.315,25.912 -8.56,25.959 -9.952,26.01 3.937,26.036 -3.835,26.073 10.592,26.073 -7.849,26.34 -9.173,26.391 -6.579,26.416 -5.664,26.416 -10.635,26.441 7.899,26.632 6.731,26.661 9.215,26.67 11.379,26.661 5.74,26.873 -9.673,27.127 -5.385,27.145 10.592,27.178 11.633,27.266 11.252,28.5
IN_VCC_AD: C0.2 R19.1 R25.2 U3.5 | length 31.9
  Top Layer w0.2: R25.2@-7.01,-18.68 R19.1@-7.01,-17.57 -6.522,-17.57 -5.61,-16.657 -5.608,-16.657 ; -5.962,-17.011 -5.608,-16.657 ; U3.5@11.14,-9.325 11.14,-10.817 C0.2@11.76,-11.437 ; U3.5@11.14,-8.941 11.14,-8.751 10.415,-8.025 6.495,-8.025 5.731,-8.788 1.363,-8.788 0.478,-7.903 -4.664,-7.903 -4.867,-8.107 -4.867,-10.06 -5.608,-10.801 -5.608,-16.657
NA_PWM: R31.1 U3.14 U5.3 | length 31.2
  Top Layer w0.2: R31.1@-11.177,-11.488 -11.207,-11.458 U5.3@-11.207,-9.006 -11.207,-5.695 -10.937,-5.425 11.669,-5.425 12.44,-4.654 U3.14@12.44,-3.325
NB_PWM: R36.1 U3.15 U5.11 | length 28.2
  Top Layer w0.2: U3.15@11.79,-3.325 11.79,-4.618 11.383,-5.025 -9.504,-5.025 -9.881,-4.648 ; -9.937,-4.592 -9.881,-4.648 ; -9.937,-4.592 U5.11@-9.937,-3.556 ; -9.937,-4.592 -9.952,-4.577 -9.952,-3.541 U5.11@-9.937,-3.556 ; U5.11@-9.937,-3.556 -9.881,-3.612 -9.881,-4.648
  Top Layer w0.8: U5.11@-9.952,-3.541 R36.1@-9.952,-1.956